# Altium PCB Mems_board.PcbDoc
Units mm, origin at the board's own origin, x right, y up, seen from the top; angles counter-clockwise.
Board outline 42.04 x 27.69 mm, 2 copper layers (Top Layer, Bottom Layer); 34 components, 27 nets, 186 pads, 9 vias.
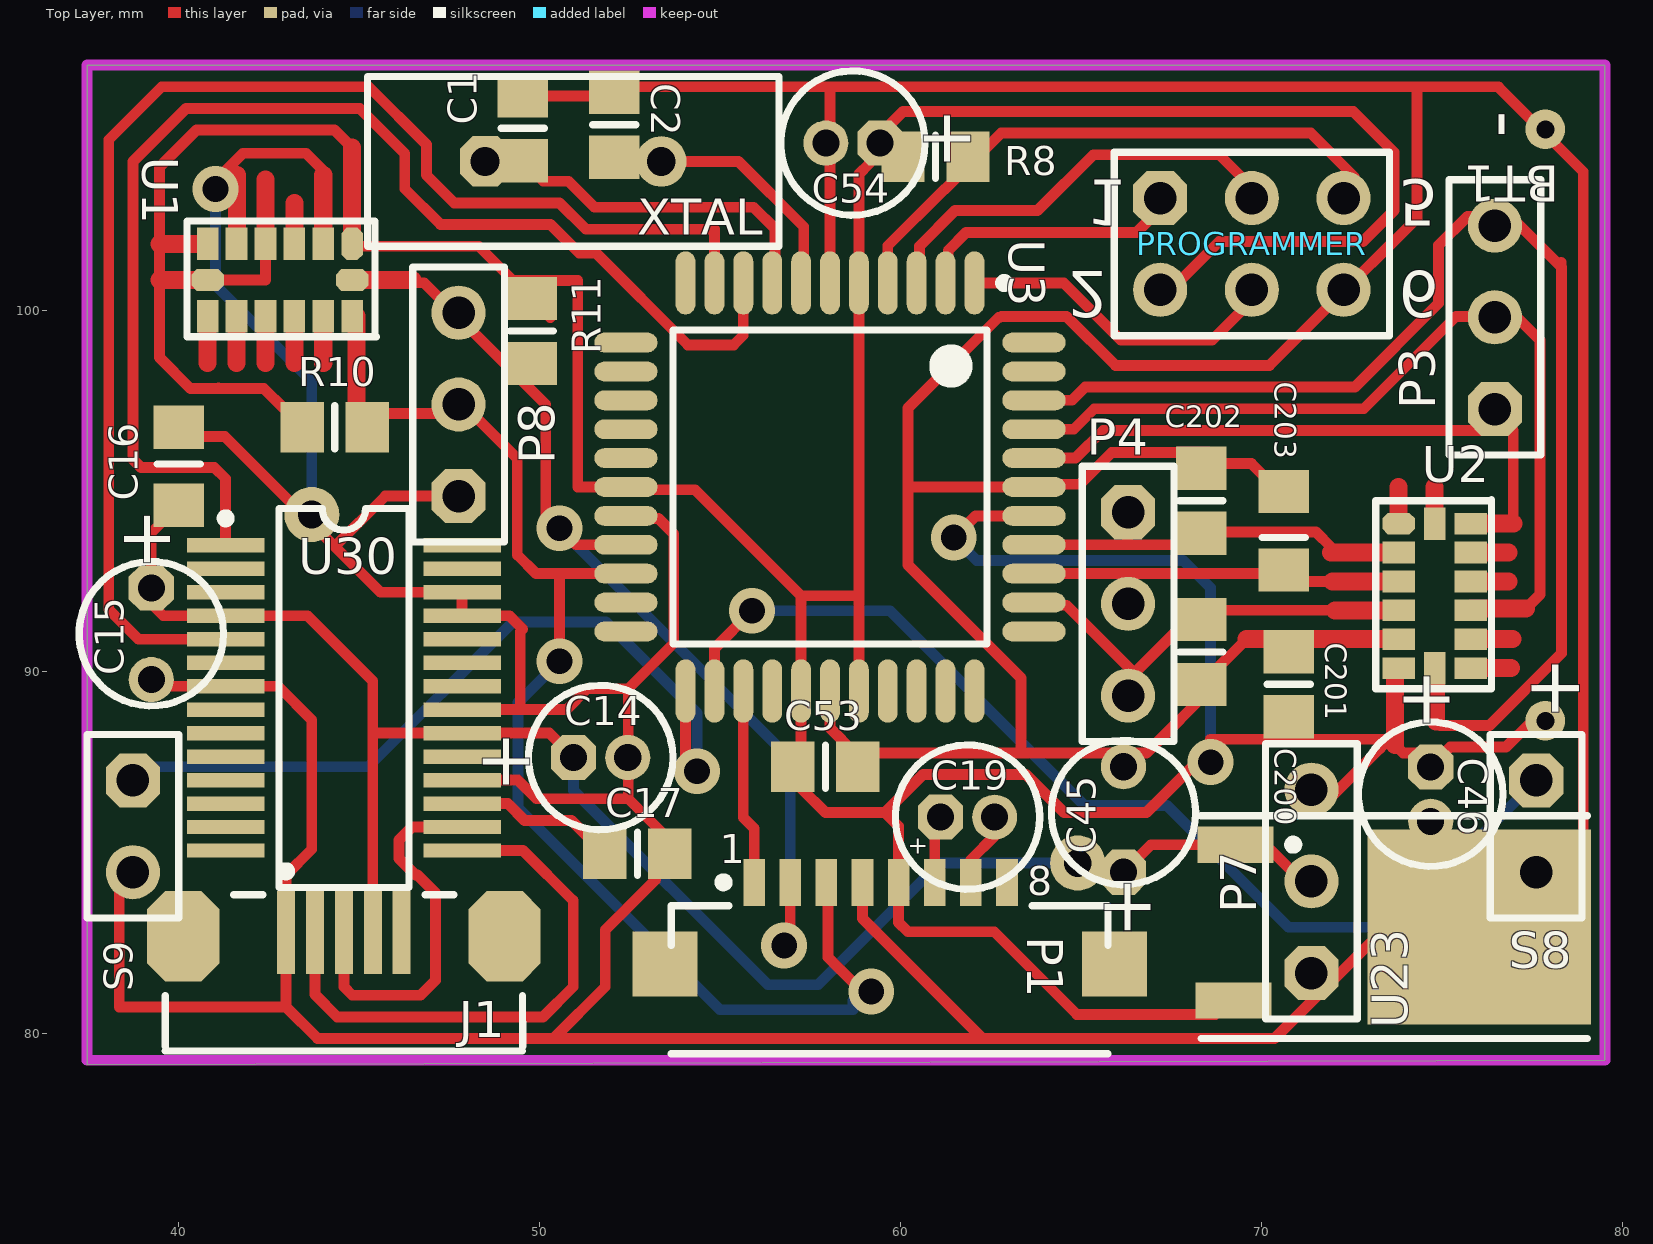
[diagram p0: Top Layer view]
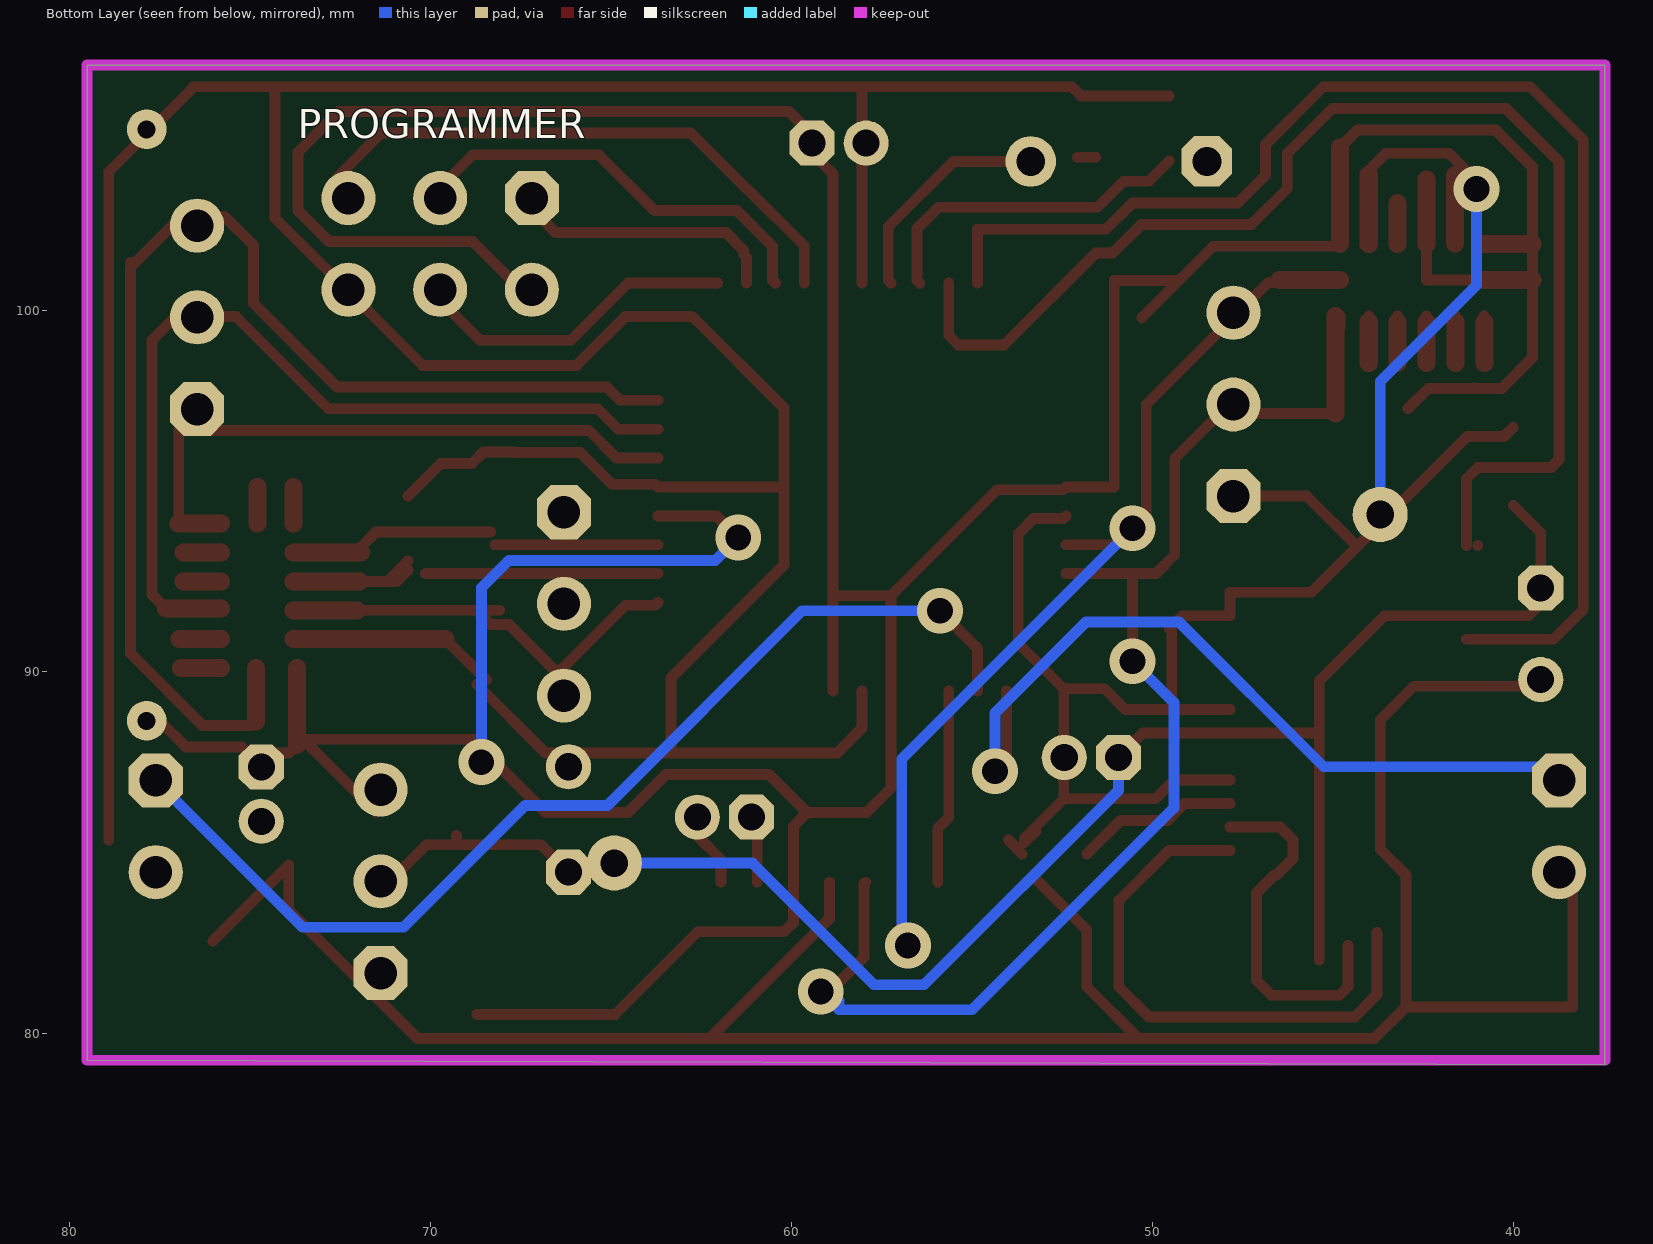
[diagram p1: Bottom Layer view, seen from below]

## Layer stack, top to bottom
Top Layer: signal copper 0.0356
Dielectric: dielectric 0.32, FR-4, Dk 4.8
Bottom Layer: signal copper 0.0356

## Board outline
37.465,106.807 79.5,106.807 79.5,79.248 37.465,79.121

## Design rules (kind name [scope] priority, off if disabled: settings)
Clearance [All] p1: gap=0.3
PolygonConnect [All] p1: connectstyle=Relief reliefconductorwidth=0.254 reliefentries=4 polygonreliefangle="90 Angle"
RoomDefinition Mems_board [InComponentClass('Mems_board')] p1: confinementstyle=ConfineIn formatcopy=TRUE lockcomponents=FALSE outline 82.042,77.597 114.554,77.597 114.554,106.045 82.042,106.045
RoutingVias [All] p1: holewidth=0.6 width=1 viastyle="Through Hole" minholewidth=0.711 minwidth=1.27 maxholewidth=0.711 maxwidth=1.27
SilkscreenOverComponentPads [All] p1: minsilkscreentomaskgap=0.254
SolderMaskExpansion [All] p1: expansion=0.102
Width [All] p1: maxlimit=0.3 minlimit=0.3 preferedwidth=0.3
27 further rules are at their usual default settings.

## Components (designator, comment, footprint, x,y, rotation, side; value= is the part's Value field where it differs from the comment)
BT1 "ML1220/V1A" ML1220-V 81.28,95.25 r270 top
C1 "Cap Pol3" RESC2012N#1 49.53,105.056 r90 top
C2 "Cap Pol3" RESC2012N#1 52.07,105.156 r90 top
C14 "Cap Pol1" CAPPR1.5-4x5#1 51.689,87.63 r0 top
C15 "Cap Pol1" CAPPR1.5-4x5#2 39.243,91.059 r270 top
C16 "Cap Pol3" RESC2012N#2 40.005,95.758 r90 top
C17 "Cap Pol3" RESC2012N#1 52.705,84.963 r0 top
C19 "Cap Pol1" CAPPR1.5-4x5#1 61.849,85.979 r0 top
C45 "Cap Pol1" CAPPR1.5-4x5#3 66.167,86.106 r90 top
C46 "Cap Pol1" CAPPR1.5-4x5#1 74.676,86.614 r270 top
C53 "Cap Pol3" RESC2012N#1 57.912,87.376 r0 top
C54 "Cap Pol1" CAPPR1.5-4x5#1 58.674,104.648 r180 top
C200 "Cap Semi" RESC2012N#1 70.739,89.662 r90 top
C201 "Cap Semi" RESC2012N#1 68.326,90.551 r270 top
C202 "Cap Semi" RESC2012N#1 68.326,94.742 r270 top
C203 "Cap Semi" RESC2012N#3 70.612,93.726 r270 top
J1 "440247-1" 440247 44.577,74.93 r270 top
P1 "Header 8" FFC/SM1.0-2H8 59.69,82.55 r0 top
P3 "Header 3" HDR1X3 76.454,97.282 r90 top
P4 "Header 3" HDR1X3 66.294,94.425 r270 top
P7 "Header 3" HDR1X3 71.374,81.661 r90 top
P8 "Header 3" HDR1X3 47.752,94.869 r90 top
PROGRAMMER "Header 3X2" HDR2X3 67.183,103.124 r0 top
R8 "Res2" RESC2012N#1 60.96,104.267 r0 top
R10 "Res2" RESC2012N#1 44.323,96.774 r0 top
R11 "Res2" RESC2012N#1 49.784,99.441 r270 top
S8 "SW-PB" HDR1X2 77.597,86.995 r270 top
S9 "SW-PB" HDR1X2 38.735,86.995 r270 top
U1 "MMA7455" "LGA14 - duplicate"#1 44.805,101.854 r270 top
U2 "MMA7341" "LGA14 - duplicate"#2 73.787,94.107 r0 top
U3 "ATmega32-16AC" 44A_N 58.039,95.123 r270 top
U23 "LF33CDT" TO-252 72.644,82.931 r270 top
U30 "FT232RL" SSOP28 44.577,89.281 r270 top
XTAL "ECS-44-20-1" HC-49U 50.927,104.14 r0 top

## Footprints (in the part's own frame and the unit in brackets; to place one, negate y for a bottom-side part, rotate by r counter-clockwise, add the part's x,y. Pads: shape width x height; smd on the part's side, far side on the other; paste and mask are expansions set on the pad)
44A_N [mm] "Thin QFP, 44-Leads, Body 10x10mm, Pitch 0.8mm, IPC Medium Density"
  oval 1.75x0.55 smd: 1(-5.65,4) 2(-5.65,3.2) 3(-5.65,2.4) 4(-5.65,1.6) 5(-5.65,0.8) 6(-5.65,0) 7(-5.65,-0.8) 8(-5.65,-1.6) 9(-5.65,-2.4) 10(-5.65,-3.2) 11(-5.65,-4) 23(5.65,-4) 24(5.65,-3.2) 25(5.65,-2.4) 26(5.65,-1.6) 27(5.65,-0.8) 28(5.65,0) 29(5.65,0.8) 30(5.65,1.6) 31(5.65,2.4) 32(5.65,3.2) 33(5.65,4)
  oval 0.55x1.75 smd: 12(-4,-5.65) 13(-3.2,-5.65) 14(-2.4,-5.65) 15(-1.6,-5.65) 16(-0.8,-5.65) 17(0,-5.65) 18(0.8,-5.65) 19(1.6,-5.65) 20(2.4,-5.65) 21(3.2,-5.65) 22(4,-5.65) 34(4,5.65) 35(3.2,5.65) 36(2.4,5.65) 37(1.6,5.65) 38(0.8,5.65) 39(0,5.65) 40(-0.8,5.65) 41(-1.6,5.65) 42(-2.4,5.65) 43(-3.2,5.65) 44(-4,5.65)
  silkscreen extent -5.77,-4.35 4.35,4.95, body extent -5,-5 5,5, height 1.2
440247 [mm] "Connector; USB2.0, Type B, SM; 5 Position; Right Angle"
  rect 2.3x0.5 smd: 1(-7.85,-1.6) 2(-7.85,-0.8) 3(-7.85,0) 4(-7.85,0.8) 5(-7.85,1.6)
  oct 2.5x2 smd: 6(-7.75,4.45) 8(-7.75,-4.45)
  rect 0x2 smd: 7(-2.25,4.45)
  rect 2.5x0 smd: 9(-2.25,-4.45)
  silkscreen extent -9.67,-4.95 -4.57,4.95
CAPPR1.5-4x5#1 [mm] "Capacitor, Electrolytic, Radial; Body 4 x 5 mm (Dia.xH typ); Pin Spacing 1.5 mm (typ)"
  oct 1.25x1.25 hole 0.75: 1(-0.75,0)
  round 1.25 hole 0.75: 2(0.75,0)
  silkscreen extent -2,-2 2,2
CAPPR1.5-4x5#2 [mm] "Capacitor, Electrolytic, Radial; Body 4 x 5 mm (Dia.xH typ); Pin Spacing 1.5 mm (typ)"
  oct 1.25x1.25 hole 0.75: 1(-1.27,0)
  round 1.25 hole 0.75: 2(1.27,0)
  silkscreen extent -2,-2 2,2
CAPPR1.5-4x5#3 [mm] "Capacitor, Electrolytic, Radial; Body 4 x 5 mm (Dia.xH typ); Pin Spacing 1.5 mm (typ)"
  oct 1.25x1.25 hole 0.75: 1(-1.651,0)
  round 1.25 hole 0.75: 2(1.27,0)
  silkscreen extent -2,-2 2,2
FFC/SM1.0-2H8 [mm] "Connector; FH12 Series; 8 Position; 1.0mm Spaced Bottom Eccentric Contact"
  rect 0.6x1.3 smd: 1(-3.75,1.625) 2(-2.75,1.625) 3(-1.75,1.625) 4(-0.75,1.625) 5(0.25,1.625) 6(1.25,1.625) 7(2.25,1.625) 8(3.25,1.625)
  rect 1.8x1.8 smd: 9(6.223,-0.635) 10(-6.223,-0.635)
  silkscreen extent -6.05,-3.13 6.05,1.75, body extent -6.1,-2.92 6.05,0.97, height 2
HC-49U [mm] "Quartz Crystal, Thru-Hole; 2 Leads; Body 11.35 x 4.65 x 13.46 mm (LxWxH max)"
  oct 1.4x1.4 hole 0.8: 1(-2.44,0)
  round 1.4 hole 0.8: 2(2.44,0)
  silkscreen extent -5.7,-2.35 5.7,2.35
HDR1X2 [mm] "Connector; Header; 2 Position"
  oct 1.5x1.5 hole 0.9: 1(0,0)
  round 1.5 hole 0.9: 2(2.54,0)
  silkscreen extent -1.27,-1.27 3.81,1.27
HDR1X3 [mm] "Connector; Header; 3 Position"
  oct 1.5x1.5 hole 0.9: 1(0,0)
  round 1.5 hole 0.9: 2(2.54,0) 3(5.08,0)
  silkscreen extent -1.27,-1.27 6.35,1.27
HDR2X3 [mm] "Connector; Header; 3x2 Position"
  oct 1.5x1.5 hole 0.9: 1(0,0)
  round 1.5 hole 0.9: 2(0,-2.54) 3(2.54,0) 4(2.54,-2.54) 5(5.08,0) 6(5.08,-2.54)
  silkscreen extent -1.27,-3.81 6.35,1.27
"LGA14 - duplicate"#1 [mm]
  oct 0.9x0.6 smd: 1(0,0)
  rect 0.9x0.6 smd: 2(0,-0.8) 3(0,-1.6) 4(0,-2.4) 5(0,-3.2) 6(0,-4) 8(2,-4) 9(2,-3.2) 10(2,-2.4) 11(2,-1.6) 12(2,-0.8) 13(2,0)
  oct 0.6x0.9 smd: 7(1,-4) 14(1,0)
  silkscreen extent -0.64,-4.57 2.57,0.67
"LGA14 - duplicate"#2 [mm]
  oct 0.9x0.6 smd: 1(0,0)
  rect 0.9x0.6 smd: 2(0,-0.8) 3(0,-1.6) 4(0,-2.4) 5(0,-3.2) 6(0,-4) 8(2,-4) 9(2,-3.2) 10(2,-2.4) 11(2,-1.6) 12(2,-0.8) 13(2,0)
  rect 0.6x0.9 smd: 7(1,-4) 14(1,0)
  silkscreen extent -0.64,-4.57 2.57,0.67
ML1220-V [mm] "Battery, Thru-Hole, Vertical Disk; 2 Leads, Body 12.5 x 2.6 mm (Dia.xW typ)"
  round 1.1 hole 0.5: 1(6.604,-3.429) 2(-9.779,-3.429)
RESC2012N#1 [mm] "Chip Resistor, Body 2.0x1.2mm, IPC Medium Density"
  rect 1.2x1.4 smd: 1(-0.9,0) 2(0.9,0)
  silkscreen extent 0,-0.6 0,0.6, body extent -1.07,-0.7 1.07,0.7, height 0.7
RESC2012N#2 [mm] "Chip Resistor, Body 2.0x1.2mm, IPC Medium Density"
  rect 1.2x1.4 smd: 1(-1.143,0) 2(1.016,0)
  silkscreen extent 0,-0.6 0,0.6, body extent -1.07,-0.7 1.07,0.7, height 0.7
RESC2012N#3 [mm] "Chip Resistor, Body 2.0x1.2mm, IPC Medium Density"
  rect 1.2x1.4 smd: 1(-1.274,0) 2(0.9,0)
  silkscreen extent 0,-0.6 0,0.6, body extent -1.07,-0.7 1.07,0.7, height 0.7
SSOP28 [mm] "SSOP, Plastic; 28 Leads; Body Width 5.3 mm; Pitch 0.65 mm"
  rect 0.4x2.15 smd: 1(-4.225,-3.275) 2(-3.575,-3.275) 3(-2.925,-3.275) 4(-2.275,-3.275) 5(-1.625,-3.275) 6(-0.975,-3.275) 7(-0.325,-3.275) 8(0.325,-3.275) 9(0.975,-3.275) 10(1.625,-3.275) 11(2.275,-3.275) 12(2.925,-3.275) 13(3.575,-3.275) 14(4.225,-3.275) 15(4.225,3.275) 16(3.575,3.275) 17(2.925,3.275) 18(2.275,3.275) 19(1.625,3.275) 20(0.975,3.275) 21(0.325,3.275) 22(-0.325,3.275) 23(-0.975,3.275) 24(-1.625,3.275) 25(-2.275,3.275) 26(-2.925,3.275) 27(-3.575,3.275) 28(-4.225,3.275)
  silkscreen extent -5.25,-3.4 5.25,1.8
TO-252 [mm] "D-PAK/TO-252-AA; 3 Leads (1 Cropped); Body 10.1 (inc. leads) x 6.6 mm (LxW max)"
  rect 1x2.1 smd: 1(-2.285,-3.375) 3(2.032,-3.429)
  rect 5.4x6.2 smd: 4(0,3.375)
  silkscreen extent -3.09,-4.32 3.09,6.38

## Part data
BT1: "Manganese Rechargeable Lithium Battery with Legs, 3V, 17mAh, Vertical Coin-Type, 12.5x2mm (Dia.xH)"
C1 C2 C16 C17 C53: "Polarized Capacitor (Surface Mount)"
C14 C15 C19 C45 C46 C54: "Polarized Capacitor (Radial)"
C200 C201 C202 C203: "Capacitor (Semiconductor SIM Model)"
J1: "USB 2.0, Right Angle, SMT, B Type, Receptacle, 5 Position, Black"
P1: "Header, 8-Pin"
P3 P4 P7 P8: "Header, 3-Pin"
PROGRAMMER: "Header, 3-Pin, Dual row"
R8 R10 R11: "Resistor"
S8 S9: "Switch"
U1 U2: "MEMS"
U3: "8-Bit AVR Microcontroller with 32K Bytes of In-System Programmable Flash Memory"
U23: "500mA, Very Low Drop (0.45V) Voltage Regulator"
U30: library part DS211E, "4 Driver/5 Receiver RS-232 Serial Port"
XTAL: "Crystal Oscillator"

## Free pads (board coordinates)
  round 1.524 hole 0.762: 1(64.897,84.709) 2(43.688,94.361)

## Via types
v1: diameter 1.27, hole 0.711, Top Layer to Bottom Layer, 9 vias

## Nets (pads, with @x,y where several pads share a name; then routed paths per layer and width w, separated by ;. In a path a pad name is that pad's centre, name@x,y a point inside that pad or via, vN(x,y) a via of type N, cw(c..) or ccw(c..) an arc to the next point about the centre after c; other vN are vias at no path point)
5V: C14.1 C15.1 C16.1 C45.1 J1.4 P7.2 pad.1 U23.1 U30.4 U30.20 | length 47.6
  Top Layer w0.3: C16.1 39.243,93.853 C15.1 39.243,91.887 39.574,91.556 U30.4 43.572,91.556 45.377,89.751 J1.4 J1.4@45.377,82.018 ; 45.377,88.303 45.38,88.306 U30.20 50.263,88.306 C14.1 ; C45.1 66.929,85.217 70.104,85.217 P7.2@70.866,84.455 ; U23.1@69.269,85.29 U23.1@69.269,85.47
  Bottom Layer w0.3: C14.1 50.939,86.719 56.32,81.338 57.706,81.338 61.077,84.709 pad.1
GND: BT1.2 C1.2 C2.2 C14.2 C15.2 C16.2 C17.2 C45.2 C46.2 C53.2 C54.2 C200.2 C201.2 C202.1 C203.1 J1.1 P1.4 P7.1 P8.1 pad.2 PROGRAMMER.6 S8.2 S9.2 U1.2 U1.5 U2.5 U3.6 U3.18 U3.28 U3.39 U23.4 U30.7 U30.18 U30.21 U30.25 U30.26 | length 244.3
  Top Layer w0.3: S9.2@38.735,84.836 38.354,84.455 38.354,80.721 42.977,80.721 ; C15.2 39.426,89.606 42.756,89.606 43.688,88.674 43.688,85.09 42.977,84.379 J1.1 42.977,80.721 ; C16.2 40.259,96.52 41.275,96.52 44.323,93.472 ; v1(41.021,103.378) v1@41.021,103.605 ; U1.5 U1.5@41.605,102.013 ; 41.618,103.759 v1@41.175,103.759 ; 44.005,103.759 44.069,103.823 43.526,104.367 41.783,104.367 v1@41.175,103.759 ; 46.99,94.869 45.72,94.869 44.323,93.472 ; U30.18 49.392,87.006 49.911,86.487 52.451,86.487 ; U30.21 50.739,88.956 51.318,89.535 52.451,89.535 ; 49.461,89.012 49.461,91.117 49.53,91.186 49.16,91.556 U30.25 U30.26 45.589,92.206 44.323,93.472 ; C1.2 51.97,105.956 C2.2 52.221,106.207 76.549,106.207 ; U3.18 52.464,94.248 53.289,94.248 53.714,93.823 53.714,90.798 52.451,89.535 ; 53.213,84.253 51.816,82.856 51.816,81.28 50.384,79.848 ; C17.2@53.224,85.598 C17.2@53.547,85.275 ; C17.2@53.53,85.407 52.451,86.487 ; C17.2 C17.2@53.986,85.344 ; U3.28 58.039,88.445 58.727,87.757 63.327,87.757 ; U3.6 58.039,106.172 ; P1.4 58.94,83.173 62.265,79.848 ; C201.2@68.442,89.778 69.571,90.907 ; C201.2@68.707,89.662 66.802,87.757 63.327,87.757 ; C203.1@70.612,94.869 69.712,95.769 68.845,95.769 68.522,96.092 67.688,96.092 67.671,96.075 66.75,96.075 66.743,96.081 65.845,96.081 64.962,95.198 63.764,95.198 U3.39 60.198,95.123 ; 74.295,106.144 74.295,102.568 73.051,101.324 73.046,101.324 70.214,98.492 65.945,98.492 64.589,99.848 62.789,99.848 62.763,99.822 62.713,99.822 60.198,97.307 60.198,95.123 ; U23.4@76.019,82.55 73.914,84.655 73.914,83.412 70.35,79.848 62.265,79.848 ; 76.549,106.204 78.9,103.853 U23.4@78.9,85.344 ; v1@41.021,103.605 v1@41.175,103.759 ; v1@41.021,103.605 41.021,103.632 41.148,103.759 v1@41.175,103.759 ; 42.977,80.721 43.85,79.848 50.384,79.848 ; 50.384,79.848 62.265,79.848 ; 52.451,86.487 52.451,89.535 ; 60.198,95.123 60.198,92.964 63.327,89.835 63.327,87.757
  Top Layer w0.5: U1.5@41.618,101.87 41.618,103.759 ; U1.2 44.005,103.759 ; 69.571,90.907 U2.5
  Bottom Layer w0.3: v1(41.021,103.378) 41.021,100.711 43.688,98.044 pad.2
NetC1_1: C1.1 U3.8 XTAL.1 | length 9.3
  Top Layer w0.3: C1.1 50.096,103.59 50.8,103.59 51.52,102.87 55.924,102.87 56.514,102.28 56.514,100.848 U3.8
NetC2_1: C2.1 U3.7 XTAL.2 | length 6.8
  Top Layer w0.3: C2.1@51.566,104.256 C2.1 ; XTAL.2 55.503,104.14 57.314,102.329 57.314,100.848 U3.7
NetC17_1: C17.1 U30.17 | length 4.5
  Top Layer w0.3: U30.17 49.113,86.356 49.582,85.887 50.881,85.887 C17.1
NetC19_1: C19.1 P1.6 | length 1.9
  Top Layer w0.3: P1.6 60.94,85.82 C19.1
NetC19_2: C19.2 P1.7 | length 2.1
  Top Layer w0.3: P1.7 61.94,84.8 62.599,85.459 C19.2
NetC201_1: C201.1 P4.3 U2.4 U3.35 | length 12.6
  Top Layer w0.3: U3.35 63.764,91.848 64.589,91.848 P4.3@66.535,89.903 ; P4.3@66.294,89.789 67.818,91.313 68.326,91.313 C201.1@68.707,91.694 ; C201.1@68.072,91.707 72.022,91.707 72.015,91.7
  Top Layer w0.5: 72.022,91.707 U2.4
NetC202_2: C202.2 P4.1 U2.2 U3.37 | length 11.6
  Top Layer w0.3: U3.37 66.167,93.523 ; P4.1@66.167,94.425 66.167,94.552 P4.1@66.294,94.679 ; P4.1 66.294,93.65 66.167,93.523 ; C202.2@68.199,93.523 66.167,93.523 ; C202.2@68.326,93.876 71.498,93.876 71.92,93.454 71.92,93.307
  Top Layer w0.5: 71.92,93.307 U2.2
NetC203_2: C203.2 P4.2 U2.3 U3.36 | length 11.4
  Top Layer w0.3: U3.36 66.294,92.723 ; P4.2 66.294,92.723 ; C203.2@70.128,92.723 66.294,92.723 ; C203.2 70.931,92.507 C203.2@71.185,92.507 ; C203.2@70.612,93.08 C203.2@71.185,92.507 ; 71.958,92.507 C203.2@71.185,92.507
  Top Layer w0.5: 71.958,92.507 U2.3
NetJ1_2: J1.2 U30.15 | length 15.5
  Top Layer w0.3: J1.2 43.777,81.064 44.393,80.448 50.095,80.448 50.927,81.28 50.927,83.666 49.537,85.056 U30.15
NetJ1_3: J1.3 U30.16 | length 10.2
  Top Layer w0.3: J1.3@44.577,82.423 44.577,81.28 44.809,81.048 46.701,81.048 47.117,81.464 47.117,83.876 46.613,84.38 46.557,84.38 46.101,84.836 46.101,85.344 46.463,85.706 U30.16
NetP1_1: P1.1 U3.25 | length 5.4
  Top Layer w0.3: U3.25 55.639,85.966 55.94,85.665 P1.1
NetP1_2: P1.2 P8.3 R11.2 U1.14 U3.19 | length 28.1
  Top Layer w0.3: 46.41,100.782 46.792,100.782 50.165,97.409 v1@50.165,94.361 ; v1@50.292,93.98 v1(50.546,93.98) 51.003,93.523 U3.19 ; v1@56.94,82.423 P1.2
  Top Layer w0.5: U1.14 46.482,100.854
  Bottom Layer w0.3: v1(50.546,93.98) 56.94,87.586 v1@56.94,82.423
  other v1: 56.769,82.423
NetP1_3: P1.3 P8.2 R10.2 U1.13 U3.20 | length 37.6
  Top Layer w0.3: U1.13@44.805,99.52 U1.13 ; R10.2@44.932,97.155 48.133,97.155 49.377,95.911 49.377,93.244 49.898,92.723 U3.20 ; v1(50.546,90.297) 50.546,92.723 ; P1.3 57.981,84.134 57.981,82.1 59.182,80.899 v1(59.182,81.153)
  Top Layer w0.5: R10.2@44.932,97.155 U1.13@44.932,99.854
  Bottom Layer w0.3: v1(50.546,90.297) 49.403,89.154 49.403,86.233 54.991,80.645 58.674,80.645 58.674,80.899 v1@58.801,80.772 ; v1@58.801,80.899 59.182,80.899 v1(59.182,81.153)
NetP3_1: P3.1 U2.13 U3.40 | length 17.4
  Top Layer w0.3: U3.40 64.838,95.923 65.607,96.692 76.962,96.692 76.962,94.107
  Top Layer w0.5: U2.13 76.962,94.107
NetP3_2: P3.2 U2.10 U3.41 | length 24.7
  Top Layer w0.3: U3.41 64.79,96.723 65.359,97.292 72.824,97.292 75.381,99.849 77.038,99.849 77.7,99.187 77.7,92.145 77.312,91.757
  Top Layer w0.5: U2.10@75.787,91.757 77.312,91.757
NetP3_3: P3.3 U2.7 U3.42 | length 34.9
  Top Layer w0.3: U3.42 64.741,97.523 65.11,97.892 72.575,97.892 74.895,100.212 74.895,101.819 75.692,102.616 76.892,102.616 78.289,101.219 ; 74.821,88.628 74.93,88.519 76.301,88.519 78.3,90.518 78.3,101.208 78.289,101.219 ; 78.289,101.346 78.289,101.219
  Top Layer w0.5: 74.821,88.628 U2.7@74.821,90.107
NetPROGRAMMER_1: PROGRAMMER.1 U3.2 | length 7.7
  Top Layer w0.3: U3.2 61.239,101.481 61.314,101.556 61.314,101.673 61.809,102.169 66.524,102.169 PROGRAMMER.1@67.48,103.124
NetPROGRAMMER_4: PROGRAMMER.4 U3.1 | length 9.2
  Top Layer w0.3: U3.1 64.513,100.773 66.099,99.187 68.623,99.187 PROGRAMMER.4@70.02,100.584
NetS8_1: S8.1 U3.24 | length 29.9
  Top Layer w0.3: U3.24 54.839,90.653 v1(55.88,91.694) 56.007,91.821 v1@56.07,91.821
  Bottom Layer w0.3: v1(55.88,91.694) 59.699,91.694 65.092,86.301 67.369,86.301 70.739,82.931 73.533,82.931 S8.1
NetS9_1: S9.1 U3.23 | length 22.5
  Top Layer w0.3: U3.23 54.039,87.566 v1(54.356,87.249) v1@54.356,87.376
  Bottom Layer w0.3: S9.1@38.798,86.931 39.243,87.376 45.252,87.376 49.258,91.382 51.834,91.382 54.356,88.86 v1(54.356,87.249)
RESET: PROGRAMMER.5 R8.2 U3.4 | length 16.3
  Top Layer w0.3: U3.4 59.639,101.803 61.207,103.371 61.227,103.371 62.78,104.924 71.352,104.924 72.56,103.716 PROGRAMMER.5@72.56,103.124
RXD: U3.9 U30.1 | length 35.2
  Top Layer w0.3: U30.1 41.302,95.35 40.987,95.665 38.955,95.665 38.735,95.885 38.735,104.14 40.202,105.607 45.015,105.607 46.263,104.359 46.263,103.383 47.256,102.39 50.303,102.39 51.093,101.6 51.562,101.6 54.102,99.06 55.372,99.06 55.639,99.327 U3.9
SCK: PROGRAMMER.3 U3.3 | length 12.1
  Top Layer w0.3: U3.3 60.514,100.848 60.514,101.789 61.503,102.778 63.789,102.778 65.335,104.324 68.82,104.324 PROGRAMMER.3@70.02,103.124
TXD: U3.10 U30.5 | length 37.6
  Top Layer w0.3: U30.5 38.888,90.906 38.065,91.729 38.065,104.74 39.532,106.207 45.264,106.207 46.863,104.608 46.863,103.759 47.632,102.99 50.551,102.99 51.281,102.26 54.839,102.26 U3.10
VCC: BT1.1 C46.1 C53.1 C54.1 C200.1 P1.5 P7.3 PROGRAMMER.2 R8.1 R10.1 R11.1 U1.1 U1.4 U1.6 U1.7 U2.6 U3.5 U3.17 U3.27 U3.29 U3.38 U23.3 | length 149.3
  Top Layer w0.3: U1.7 42.402,100.854 42.402,101.851 U1.4 ; U1.6 U1.6@40.805,101.933 ; R10.1@42.915,97.293 42.356,97.852 41.111,97.852 41.103,97.86 41.095,97.852 40.324,97.852 39.471,98.705 39.471,100.854 39.471,101.854 39.471,103.987 40.491,105.007 44.319,105.007 44.805,104.521 ; U1.1@44.805,101.822 44.805,101.79 48.313,101.79 R11.1@50.292,99.811 ; R11.1@49.265,100.838 51.054,100.838 51.054,95.123 U3.17@52.324,95.123 ; U3.17 52.464,95.048 54.304,95.048 57.239,92.113 ; U3.29 58.839,92.037 ; v1(61.468,93.726) 62.065,94.323 U3.38 ; PROGRAMMER.2@67.48,100.584 68.82,101.924 72.803,101.924 73.66,102.781 73.66,104.394 72.53,105.524 60.058,105.524 59.126,104.592 59.126,104.076 58.839,103.789 U3.5 58.839,92.037 ; v1(68.58,87.503) v1@68.58,87.884 ; U23.3@68.707,80.518 64.874,80.518 62.588,82.804 60.198,82.804 59.94,83.062 P1.5 59.94,85.729 59.563,86.106 ; P7.3@71.501,86.114 73.259,87.872 73.267,87.872 ; 73.279,87.872 73.267,87.872 ; 73.692,87.979 73.914,87.757 74.295,87.757 74.676,87.376 75.219,87.919 76.76,87.919 77.487,88.646 BT1.1 ; 57.239,92.113 58.763,92.113 58.839,92.037 ; 57.239,92.113 U3.27 57.239,86.779 57.912,86.106 59.563,86.106 ; 59.563,86.106 60.614,87.157 63.465,87.157 64.516,86.106 66.802,86.106 v1@68.58,87.884 ; v1@68.58,87.884 68.58,88.138 73.533,88.138 73.267,87.872
  Top Layer w0.5: 39.471,100.854 U1.7 ; 39.471,101.854 U1.6 ; U1.4 42.405,103.632 ; U1.1 44.805,104.521 ; 73.692,87.979 U2.6@73.692,90.107
  Bottom Layer w0.3: v1(61.468,93.726) 62.103,93.091 67.82,93.091 68.58,92.331 v1(68.58,87.503)
pads on no net: J1.5 J1.6 J1.7 J1.8 J1.9 P1.8 P1.9 P1.10 U1.3 U1.8 U1.9 U1.10 U1.11 U1.12 U2.1 U2.8 U2.9 U2.11 U2.12 U2.14 U3.11 U3.12 U3.13 U3.14 U3.15 U3.16 U3.21 U3.22 U3.26 U3.30 U3.31 U3.32 U3.33 U3.34 U3.43 U3.44 U30.2 U30.3 U30.6 U30.8 U30.9 U30.10 U30.11 U30.12 U30.13 U30.14 U30.19 U30.22 U30.23 U30.24 U30.27 U30.28
copper on no net: | length 14.3
  Top Layer w0.3: 40.805,99.687 40.805,99.854 ; 41.605,99.687 41.605,99.854 ; 42.405,99.687 42.405,99.854 ; 43.205,99.687 43.205,99.854 ; 43.205,101.854 43.205,102.013 ; 44.005,99.687 44.005,99.854 ; 76.899,90.107 76.93,90.138 ; 76.937,90.907 76.949,90.919
  Top Layer w0.5: 40.805,98.552 40.805,99.687 ; 41.605,98.552 41.605,99.687 ; 42.405,98.552 42.405,99.687 ; 43.205,98.552 43.205,99.687 ; 43.205,101.854 43.205,102.989 ; 44.005,98.552 44.005,99.687 ; 73.787,94.107 73.787,95.123 ; 74.787,94.107 74.787,95.123 ; 75.787,90.107 76.899,90.107 ; 75.787,90.907 76.937,90.907 ; 75.787,92.507 76.835,92.507 ; 75.787,93.307 76.835,93.307

## Keep-outs
Keep-Out Layer:
  lines w0.3: 37.465,79.248 37.465,106.807 79.5,106.807 79.5,79.248 37.465,79.248

## Silkscreen, mask and mechanical layers (free items; w line width, h text height)
Drill Drawing:
  text ".LEGEND" at 85.88,81.28 h1.52
  text "Drill Drawing." at 85.88,78.74 h1.52

## Dimensions
79.5,79.248 to 37.465,106.807 on Mechanical 1
37.465,79.248 to 79.5,79.248 on Mechanical 1

## Text inside footprints (layer, text, board x,y; h text height)
BT1: Top Overlay "-" at 76.073,105.537 h1.52 r270; Top Overlay "+" at 77.47,90.424 h1.52 r270
C14: Top Overlay "+" at 48.214,86.88 h1.5
C15: Top Overlay "+" at 38.493,94.534 h1.5 r270
C19: Top Overlay "+" at 60.198,84.963 h0.5
C45: Top Overlay "+" at 66.917,82.631 h1.5 r90
C46: Top Overlay "+" at 73.926,90.089 h1.5 r270
C54: Top Overlay "+" at 62.149,105.398 h1.5 r180
J1: Mechanical 1 "PCB Edge" at 39.878,79.756 h0.25
P1: Top Overlay "1" at 54.991,84.709 h0.8; Top Overlay "8" at 63.5,83.82 h0.8
PROGRAMMER: Top Overlay "1" at 65.151,103.632 h1.27 r180; Top Overlay "2" at 64.643,101.092 h1.27 r180; Top Overlay "5" at 73.787,103.632 h1.27 r180; Top Overlay "6" at 73.787,101.092 h1.27 r180